# Altium PCB 1_ir-tara-f.PcbDoc (part 4 of 8)
Units mm, origin at the board's own origin, x right, y up, seen from the top; angles counter-clockwise.
Board outline 151 x 86.38 mm, 2 copper layers (Top Layer, Bottom Layer); 728 components, 20 nets, 2100 pads, 0 vias.
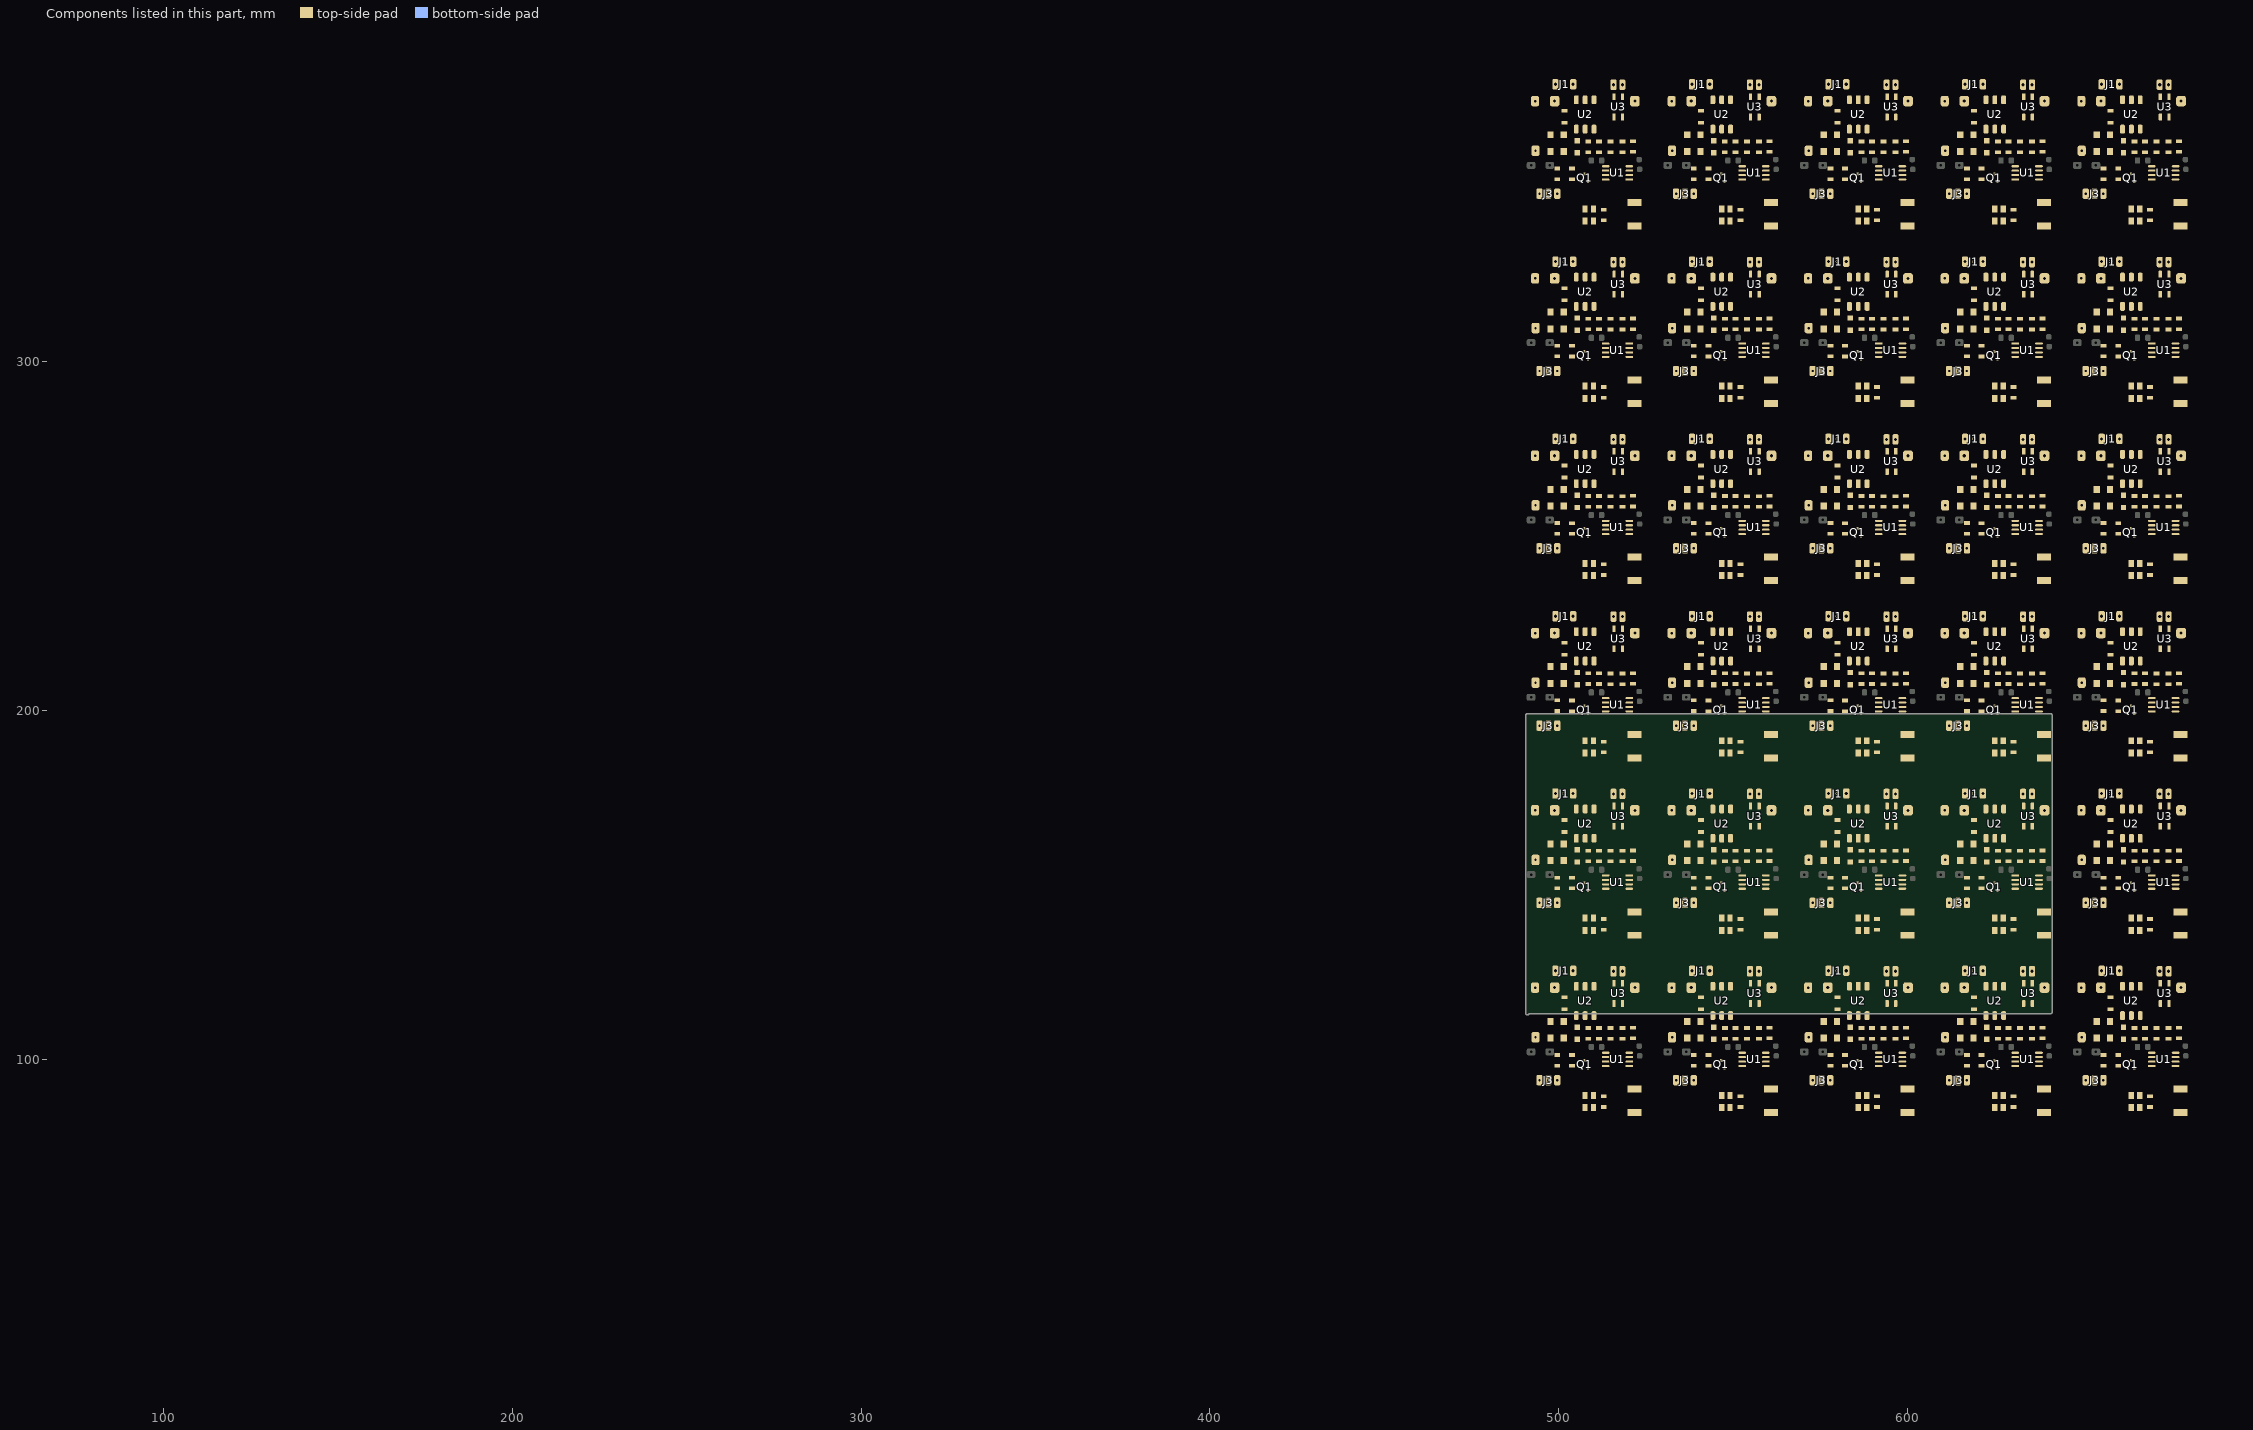
[diagram p4: the components of this part, seen from the top]

## Nets (pads, with @x,y where several pads share a name; then routed paths per layer and width w, separated by ;. In a path a pad name is that pad's centre, name@x,y a point inside that pad or via, vN(x,y) a via of type N, cw(c..) or ccw(c..) an arc to the next point about the centre after c; other vN are vias at no path point) (continued)
copper on no net: | length 14133.1
  Top Layer w0.254: 524.606,109.92 526.638,109.92 526.638,111.952 524.606,111.952 524.606,109.92 ; 524.606,160.758 524.606,162.79 526.638,162.79 526.638,160.758 524.606,160.758 ; 524.606,211.597 526.638,211.597 526.638,213.629 524.606,213.629 524.606,211.597 ; 524.606,262.436 526.638,262.436 526.638,264.468 524.606,264.468 524.606,262.436 ; 524.606,313.274 526.638,313.274 526.638,315.306 524.606,315.306 524.606,313.274 ; 524.606,364.113 526.638,364.113 526.638,366.145 524.606,366.145 524.606,364.113 ; 526.13,110.936 ccw(c525.622,110.936) 526.13,110.936 ; 526.13,161.774 ccw(c525.622,161.774) 526.13,161.774 ; 526.13,212.613 ccw(c525.622,212.613) 526.13,212.613 ; 526.13,263.452 ccw(c525.622,263.452) 526.13,263.452 ; 526.13,314.29 ccw(c525.622,314.29) 526.13,314.29 ; 526.13,365.129 ccw(c525.622,365.129) 526.13,365.129 ; 563.76,109.92 565.792,109.92 565.792,111.952 563.76,111.952 563.76,109.92 ; 563.76,160.758 563.76,162.79 565.792,162.79 565.792,160.758 563.76,160.758 ; 563.76,211.597 565.792,211.597 565.792,213.629 563.76,213.629 563.76,211.597 ; 563.76,262.436 565.792,262.436 565.792,264.468 563.76,264.468 563.76,262.436 ; 563.76,313.274 565.792,313.274 565.792,315.306 563.76,315.306 563.76,313.274 ; 563.76,364.113 565.792,364.113 565.792,366.145 563.76,366.145 563.76,364.113 ; 565.284,110.936 ccw(c564.776,110.936) 565.284,110.936 ; 565.284,161.774 ccw(c564.776,161.774) 565.284,161.774 ; 565.284,212.613 ccw(c564.776,212.613) 565.284,212.613 ; 565.284,263.452 ccw(c564.776,263.452) 565.284,263.452 ; 565.284,314.29 ccw(c564.776,314.29) 565.284,314.29 ; 565.284,365.129 ccw(c564.776,365.129) 565.284,365.129 ; 602.915,109.92 602.915,111.952 604.947,111.952 604.947,109.92 602.915,109.92 ; 602.915,160.758 604.947,160.758 604.947,162.79 602.915,162.79 602.915,160.758 ; 602.915,211.597 602.915,213.629 604.947,213.629 604.947,211.597 602.915,211.597 ; 602.915,262.436 602.915,264.468 604.947,264.468 604.947,262.436 602.915,262.436 ; 602.915,313.274 602.915,315.306 604.947,315.306 604.947,313.274 602.915,313.274 ; 602.915,364.113 602.915,366.145 604.947,366.145 604.947,364.113 602.915,364.113 ; 604.439,110.936 ccw(c603.931,110.936) 604.439,110.936 ; 604.439,161.774 ccw(c603.931,161.774) 604.439,161.774 ; 604.439,212.613 ccw(c603.931,212.613) 604.439,212.613 ; 604.439,263.452 ccw(c603.931,263.452) 604.439,263.452 ; 604.439,314.29 ccw(c603.931,314.29) 604.439,314.29 ; 604.439,365.129 ccw(c603.931,365.129) 604.439,365.129 ; 642.07,109.92 644.102,109.92 644.102,111.952 642.07,111.952 642.07,109.92 ; 642.07,160.758 642.07,162.79 644.102,162.79 644.102,160.758 642.07,160.758 ; 642.07,211.597 644.102,211.597 644.102,213.629 642.07,213.629 642.07,211.597 ; 642.07,262.436 644.102,262.436 644.102,264.468 642.07,264.468 642.07,262.436 ; 642.07,313.274 644.102,313.274 644.102,315.306 642.07,315.306 642.07,313.274 ; 642.07,364.113 644.102,364.113 644.102,366.145 642.07,366.145 642.07,364.113 ; 643.594,110.936 ccw(c643.086,110.936) 643.594,110.936 ; 643.594,161.774 ccw(c643.086,161.774) 643.594,161.774 ; 643.594,212.613 ccw(c643.086,212.613) 643.594,212.613 ; 643.594,263.452 ccw(c643.086,263.452) 643.594,263.452 ; 643.594,314.29 ccw(c643.086,314.29) 643.594,314.29 ; 643.594,365.129 ccw(c643.086,365.129) 643.594,365.129 ; 681.224,109.92 683.256,109.92 683.256,111.952 681.224,111.952 681.224,109.92 ; 681.224,160.758 681.224,162.79 683.256,162.79 683.256,160.758 681.224,160.758 ; 681.224,211.597 683.256,211.597 683.256,213.629 681.224,213.629 681.224,211.597 ; 681.224,262.436 683.256,262.436 683.256,264.468 681.224,264.468 681.224,262.436 ; 681.224,313.274 683.256,313.274 683.256,315.306 681.224,315.306 681.224,313.274 ; 681.224,364.113 683.256,364.113 683.256,366.145 681.224,366.145 681.224,364.113 ; 682.748,110.936 ccw(c682.24,110.936) 682.748,110.936 ; 682.748,161.774 ccw(c682.24,161.774) 682.748,161.774 ; 682.748,212.613 ccw(c682.24,212.613) 682.748,212.613 ; 682.748,263.452 ccw(c682.24,263.452) 682.748,263.452 ; 682.748,314.29 ccw(c682.24,314.29) 682.748,314.29 ; 682.748,365.129 ccw(c682.24,365.129) 682.748,365.129
  Top Layer w0.5: 507.461,86.199 507.588,86.199 510.001,86.199 ; 507.461,137.037 507.588,137.037 510.001,137.037 ; 507.461,187.876 507.588,187.876 510.001,187.876 ; 507.461,238.715 507.588,238.715 510.001,238.715 ; 507.461,289.553 507.588,289.553 510.001,289.553 ; 507.461,340.392 507.588,340.392 510.001,340.392 ; 511.525,109.024 511.85,109.024 512.125,108.749 512.125,108.685 ; 511.525,159.862 511.85,159.862 512.125,159.587 512.125,159.523 ; 511.525,210.701 511.85,210.701 512.125,210.426 512.125,210.362 ; 511.525,261.54 511.85,261.54 512.125,261.265 512.125,261.201 ; 511.525,312.378 511.85,312.378 512.125,312.103 512.125,312.039 ; 511.525,363.217 511.85,363.217 512.125,362.942 512.125,362.878 ; 520.259,100.649 523.075,100.649 ; 520.259,151.487 523.075,151.487 ; 520.259,202.326 523.075,202.326 ; 520.259,253.165 523.075,253.165 ; 520.259,304.003 523.075,304.003 ; 520.259,354.842 523.075,354.842 ; 520.743,101.919 520.789,101.965 ; 520.743,152.757 520.789,152.804 ; 520.743,203.596 520.789,203.642 ; 520.743,254.435 520.789,254.481 ; 520.743,305.273 520.789,305.319 ; 520.743,356.112 520.789,356.158 ; 546.615,86.199 546.742,86.199 549.155,86.199 ; 546.615,137.037 546.742,137.037 549.155,137.037 ; 546.615,187.876 546.742,187.876 549.155,187.876 ; 546.615,238.715 546.742,238.715 549.155,238.715 ; 546.615,289.553 546.742,289.553 549.155,289.553 ; 546.615,340.392 546.742,340.392 549.155,340.392 ; 550.679,109.024 551.004,109.024 551.279,108.749 551.279,108.685 ; 550.679,159.862 551.004,159.862 551.279,159.587 551.279,159.523 ; 550.679,210.701 551.004,210.701 551.279,210.426 551.279,210.362 ; 550.679,261.54 551.004,261.54 551.279,261.265 551.279,261.201 ; 550.679,312.378 551.004,312.378 551.279,312.103 551.279,312.039 ; 550.679,363.217 551.004,363.217 551.279,362.942 551.279,362.878 ; 559.413,100.649 562.23,100.649 ; 559.413,151.487 562.23,151.487 ; 559.413,202.326 562.23,202.326 ; 559.413,253.165 562.23,253.165 ; 559.413,304.003 562.23,304.003 ; 559.413,354.842 562.23,354.842 ; 559.897,101.919 559.943,101.965 ; 559.897,152.757 559.943,152.804 ; 559.897,203.596 559.943,203.642 ; 559.897,254.435 559.943,254.481 ; 559.897,305.273 559.943,305.319 ; 559.897,356.112 559.943,356.158 ; 585.77,86.199 585.897,86.199 588.31,86.199 ; 585.77,187.876 585.897,187.876 588.31,187.876 ; 585.77,238.715 585.897,238.715 588.31,238.715 ; 585.77,289.553 585.897,289.553 588.31,289.553 ; 585.77,340.392 585.897,340.392 588.31,340.392 ; 589.834,109.024 590.159,109.024 590.434,108.749 590.434,108.685 ; 589.834,210.701 590.159,210.701 590.434,210.426 590.434,210.362 ; 589.834,261.54 590.159,261.54 590.434,261.265 590.434,261.201 ; 589.834,312.378 590.159,312.378 590.434,312.103 590.434,312.039 ; 589.834,363.217 590.159,363.217 590.434,362.942 590.434,362.878 ; 598.568,100.649 601.384,100.649 ; 598.568,202.326 601.384,202.326 ; 598.568,253.165 601.384,253.165 ; 598.568,304.003 601.384,304.003 ; 598.568,354.842 601.384,354.842 ; 599.052,101.919 599.098,101.965 ; 599.052,203.596 599.098,203.642 ; 599.052,254.435 599.098,254.481 ; 599.052,305.273 599.098,305.319 ; 599.052,356.112 599.098,356.158 ; 624.925,86.199 625.052,86.199 627.465,86.199 ; 624.925,137.037 625.052,137.037 627.465,137.037 ; 624.925,187.876 625.052,187.876 627.465,187.876 ; 624.925,238.715 625.052,238.715 627.465,238.715 ; 624.925,289.553 625.052,289.553 627.465,289.553 ; 624.925,340.392 625.052,340.392 627.465,340.392 ; 628.989,109.024 629.314,109.024 629.589,108.749 629.589,108.685 ; 628.989,159.862 629.314,159.862 629.589,159.587 629.589,159.523 ; 628.989,210.701 629.314,210.701 629.589,210.426 629.589,210.362 ; 628.989,261.54 629.314,261.54 629.589,261.265 629.589,261.201 ; 628.989,312.378 629.314,312.378 629.589,312.103 629.589,312.039 ; 628.989,363.217 629.314,363.217 629.589,362.942 629.589,362.878 ; 637.723,100.649 640.539,100.649 ; 637.723,151.487 640.539,151.487 ; 637.723,202.326 640.539,202.326 ; 637.723,253.165 640.539,253.165 ; 637.723,304.003 640.539,304.003 ; 637.723,354.842 640.539,354.842 ; 638.206,101.919 638.253,101.965 ; 638.206,152.757 638.253,152.804 ; 638.206,203.596 638.253,203.642 ; 638.206,254.435 638.253,254.481 ; 638.206,305.273 638.253,305.319 ; 638.206,356.112 638.253,356.158 ; 664.079,86.199 664.206,86.199 666.619,86.199 ; 664.079,137.037 664.206,137.037 666.619,137.037 ; 664.079,187.876 664.206,187.876 666.619,187.876 ; 664.079,238.715 664.206,238.715 666.619,238.715 ; 664.079,289.553 664.206,289.553 666.619,289.553 ; 664.079,340.392 664.206,340.392 666.619,340.392 ; 668.143,109.024 668.468,109.024 668.743,108.749 668.743,108.685 ; 668.143,159.862 668.468,159.862 668.743,159.587 668.743,159.523 ; 668.143,210.701 668.468,210.701 668.743,210.426 668.743,210.362 ; 668.143,261.54 668.468,261.54 668.743,261.265 668.743,261.201 ; 668.143,312.378 668.468,312.378 668.743,312.103 668.743,312.039 ; 668.143,363.217 668.468,363.217 668.743,362.942 668.743,362.878 ; 676.877,100.649 679.694,100.649 ; 676.877,151.487 679.694,151.487 ; 676.877,202.326 679.694,202.326 ; 676.877,253.165 679.694,253.165 ; 676.877,304.003 679.694,304.003 ; 676.877,354.842 679.694,354.842 ; 677.361,101.919 677.407,101.965 ; 677.361,152.757 677.407,152.804 ; 677.361,203.596 677.407,203.642 ; 677.361,254.435 677.407,254.481 ; 677.361,305.273 677.407,305.319 ; 677.361,356.112 677.407,356.158
  Top Layer w0.6: 499.333,104.205 503.75,104.205 505.111,105.566 505.302,105.757 ; 499.333,155.043 503.75,155.043 505.111,156.405 505.302,156.595 ; 499.333,205.882 503.75,205.882 505.111,207.244 505.302,207.434 ; 499.333,256.721 503.75,256.721 505.111,258.082 505.302,258.273 ; 499.333,307.559 503.75,307.559 505.111,308.921 505.302,309.111 ; 499.333,358.398 503.75,358.398 505.111,359.759 505.302,359.95 ; 499.587,94.299 499.523,94.362 499.523,96.36 499.172,96.712 498.063,96.712 497.174,97.601 497.174,98.871 498.063,99.76 500.718,99.76 501.619,100.661 501.619,102.435 501.97,102.786 504.028,102.786 504.05,102.808 509.366,102.808 ; 499.587,98.227 499.728,98.367 501.229,98.367 502.558,99.696 507.461,99.696 ; 499.587,145.137 499.523,145.201 499.523,147.199 499.172,147.55 498.063,147.55 497.174,148.439 497.174,149.709 498.063,150.598 500.718,150.598 501.619,151.5 501.619,153.273 501.97,153.625 504.028,153.625 504.05,153.646 509.366,153.646 ; 499.587,149.065 499.728,149.206 501.229,149.206 502.558,150.535 507.461,150.535 ; 499.587,195.976 499.523,196.04 499.523,198.038 499.172,198.389 498.063,198.389 497.174,199.278 497.174,200.548 498.063,201.437 500.718,201.437 501.619,202.338 501.619,204.112 501.97,204.463 504.028,204.463 504.05,204.485 509.366,204.485 ; 499.587,199.904 499.728,200.045 501.229,200.045 502.558,201.374 507.461,201.374 ; 499.587,246.815 499.523,246.878 499.523,248.876 499.172,249.228 498.063,249.228 497.174,250.117 497.174,251.387 498.063,252.276 500.718,252.276 501.619,253.177 501.619,254.95 501.97,255.302 504.028,255.302 504.05,255.324 509.366,255.324 ; 499.587,250.743 499.728,250.883 501.229,250.883 502.558,252.212 507.461,252.212 ; 499.587,297.653 499.523,297.717 499.523,299.715 499.172,300.066 498.063,300.066 497.174,300.955 497.174,302.225 498.063,303.114 500.718,303.114 501.619,304.015 501.619,305.789 501.97,306.14 504.028,306.14 504.05,306.162 509.366,306.162 ; 499.587,301.581 499.728,301.722 501.229,301.722 502.558,303.051 507.461,303.051 ; 499.587,348.492 499.523,348.555 499.523,350.553 499.172,350.905 498.063,350.905 497.174,351.794 497.174,353.064 498.063,353.953 500.718,353.953 501.619,354.854 501.619,356.628 501.97,356.979 504.028,356.979 504.05,357.001 509.366,357.001 ; 499.587,352.42 499.728,352.561 501.229,352.561 502.558,353.89 507.461,353.89 ; 503.778,101.42 508.468,101.42 509.874,100.014 509.874,97.474 510.763,96.585 519.145,96.585 519.82,97.26 519.82,98.109 520.259,98.109 ; 503.778,152.258 508.468,152.258 509.874,150.852 509.874,148.312 510.763,147.423 519.145,147.423 519.82,148.099 519.82,148.947 520.259,148.947 ; 503.778,203.097 508.468,203.097 509.874,201.691 509.874,199.151 510.763,198.262 519.145,198.262 519.82,198.937 519.82,199.786 520.259,199.786 ; 503.778,253.936 508.468,253.936 509.874,252.53 509.874,249.99 510.763,249.101 519.145,249.101 519.82,249.776 519.82,250.625 520.259,250.625 ; 503.778,304.774 508.468,304.774 509.874,303.368 509.874,300.828 510.763,299.939 519.145,299.939 519.82,300.615 519.82,301.463 520.259,301.463 ; 503.778,355.613 508.468,355.613 509.874,354.207 509.874,351.667 510.763,350.778 519.145,350.778 519.82,351.453 519.82,352.302 520.259,352.302 ; 507.461,89.699 507.461,92.902 509.747,95.188 521.304,95.188 522.402,96.286 522.402,99.086 522.109,99.379 520.461,99.379 ; 507.461,140.537 507.461,143.74 509.747,146.026 521.304,146.026 522.402,147.124 522.402,149.924 522.109,150.217 520.461,150.217 ; 507.461,191.376 507.461,194.579 509.747,196.865 521.304,196.865 522.402,197.963 522.402,200.763 522.109,201.056 520.461,201.056 ; 507.461,242.215 507.461,245.418 509.747,247.704 521.304,247.704 522.402,248.802 522.402,251.602 522.109,251.895 520.461,251.895 ; 507.461,293.053 507.461,296.256 509.747,298.542 521.304,298.542 522.402,299.64 522.402,302.44 522.109,302.733 520.461,302.733 ; 507.461,343.892 507.461,347.095 509.747,349.381 521.304,349.381 522.402,350.479 522.402,353.279 522.109,353.572 520.461,353.572 ; 509.366,103.57 509.366,102.935 511.144,101.157 511.144,98.402 511.437,98.109 513.459,98.109 ; 509.366,154.408 509.366,153.773 511.144,151.995 511.144,149.24 511.437,148.947 513.459,148.947 ; 509.366,205.247 509.366,204.612 511.144,202.834 511.144,200.079 511.437,199.786 513.459,199.786 ; 509.366,256.086 509.366,255.451 511.144,253.673 511.144,250.918 511.437,250.625 513.459,250.625 ; 509.366,306.924 509.366,306.289 511.144,304.511 511.144,301.756 511.437,301.463 513.459,301.463 ; 509.366,357.763 509.366,357.128 511.144,355.35 511.144,352.595 511.437,352.302 513.459,352.302 ; 509.908,86.292 510.001,86.199 510.094,86.292 ; 509.908,137.131 510.001,137.037 510.094,137.131 ; 509.908,187.969 510.001,187.876 510.094,187.969 ; 509.908,238.808 510.001,238.715 510.094,238.808 ; 509.908,289.646 510.001,289.553 510.094,289.646 ; 509.908,340.485 510.001,340.392 510.094,340.485 ; 510.001,89.699 510.037,89.735 510.037,93.192 510.636,93.791 522.32,93.791 523.844,95.315 523.844,100.607 523.238,101.213 523.209,101.03 ; 510.001,140.537 510.037,140.573 510.037,144.03 510.636,144.629 522.32,144.629 523.844,146.153 523.844,151.445 523.238,152.051 523.209,151.868 ; 510.001,191.376 510.037,191.412 510.037,194.869 510.636,195.468 522.32,195.468 523.844,196.992 523.844,202.284 523.238,202.89 523.209,202.707 ; 510.001,242.215 510.037,242.251 510.037,245.708 510.636,246.307 522.32,246.307 523.844,247.831 523.844,253.123 523.238,253.729 523.209,253.546 ; 510.001,293.053 510.037,293.089 510.037,296.546 510.636,297.145 522.32,297.145 523.844,298.669 523.844,303.961 523.238,304.567 523.209,304.384 ; 510.001,343.892 510.037,343.928 510.037,347.385 510.636,347.984 522.32,347.984 523.844,349.508 523.844,354.8 523.238,355.406 523.209,355.223 ; 511.525,105.974 511.808,105.974 512.033,105.749 ; 511.525,156.812 511.808,156.812 512.033,156.587 ; 511.525,207.651 511.808,207.651 512.033,207.426 ; 511.525,258.49 511.808,258.49 512.033,258.265 ; 511.525,309.328 511.808,309.328 512.033,309.103 ; 511.525,360.167 511.808,360.167 512.033,359.942 ; 512.033,104.136 512.316,103.853 ; 512.033,154.975 512.316,154.692 ; 512.033,205.814 512.316,205.531 ; 512.033,256.652 512.316,256.369 ; 512.033,307.491 512.316,307.208 ; 512.033,358.329 512.316,358.046 ; 512.316,103.57 512.728,103.158 512.728,101.919 513.459,101.919 ; 512.316,154.408 512.728,153.996 512.728,152.757 513.459,152.757 ; 512.316,205.247 512.728,204.835 512.728,203.596 513.459,203.596 ; 512.316,256.086 512.728,255.674 512.728,254.435 513.459,254.435 ; 512.316,306.924 512.728,306.512 512.728,305.273 513.459,305.273 ; 512.316,357.763 512.728,357.351 512.728,356.112 513.459,356.112 ; 512.829,86.292 512.922,86.385 ; 512.829,137.131 512.922,137.224 ; 512.829,187.969 512.922,188.062 ; 512.829,238.808 512.922,238.901 ; 512.829,289.646 512.922,289.74 ; 512.829,340.485 512.922,340.578 ; 538.487,104.205 542.904,104.205 544.266,105.566 544.456,105.757 ; 538.487,155.043 542.904,155.043 544.266,156.405 544.456,156.595 ; 538.487,205.882 542.904,205.882 544.266,207.244 544.456,207.434 ; 538.487,256.721 542.904,256.721 544.266,258.082 544.456,258.273 ; 538.487,307.559 542.904,307.559 544.266,308.921 544.456,309.111 ; 538.487,358.398 542.904,358.398 544.266,359.759 544.456,359.95 ; 538.741,94.299 538.678,94.362 538.678,96.36 538.326,96.712 537.217,96.712 536.328,97.601 536.328,98.871 537.217,99.76 539.872,99.76 540.773,100.661 540.773,102.435 541.125,102.786 543.183,102.786 543.205,102.808 548.52,102.808 ; 538.741,98.227 538.882,98.367 540.383,98.367 541.712,99.696 546.615,99.696 ; 538.741,145.137 538.678,145.201 538.678,147.199 538.326,147.55 537.217,147.55 536.328,148.439 536.328,149.709 537.217,150.598 539.872,150.598 540.773,151.5 540.773,153.273 541.125,153.625 543.183,153.625 543.205,153.646 548.52,153.646 ; 538.741,149.065 538.882,149.206 540.383,149.206 541.712,150.535 546.615,150.535 ; 538.741,195.976 538.678,196.04 538.678,198.038 538.326,198.389 537.217,198.389 536.328,199.278 536.328,200.548 537.217,201.437 539.872,201.437 540.773,202.338 540.773,204.112 541.125,204.463 543.183,204.463 543.204,204.485 548.52,204.485 ; 538.741,199.904 538.882,200.045 540.383,200.045 541.712,201.374 546.615,201.374 ; 538.741,246.815 538.678,246.878 538.678,248.876 538.326,249.228 537.217,249.228 536.328,250.117 536.328,251.387 537.217,252.276 539.872,252.276 540.773,253.177 540.773,254.95 541.125,255.302 543.183,255.302 543.204,255.324 548.52,255.324 ; 538.741,250.743 538.882,250.883 540.383,250.883 541.712,252.212 546.615,252.212 ; 538.741,297.653 538.678,297.717 538.678,299.715 538.326,300.066 537.217,300.066 536.328,300.955 536.328,302.225 537.217,303.114 539.872,303.114 540.773,304.015 540.773,305.789 541.125,306.14 543.183,306.14 543.204,306.162 548.52,306.162 ; 538.741,301.581 538.882,301.722 540.383,301.722 541.712,303.051 546.615,303.051 ; 538.741,348.492 538.678,348.555 538.678,350.553 538.326,350.905 537.217,350.905 536.328,351.794 536.328,353.064 537.217,353.953 539.872,353.953 540.773,354.854 540.773,356.628 541.125,356.979 543.183,356.979 543.204,357.001 548.52,357.001 ; 538.741,352.42 538.882,352.561 540.383,352.561 541.712,353.89 546.615,353.89 ; 542.932,101.42 547.622,101.42 549.028,100.014 549.028,97.474 549.917,96.585 558.299,96.585 558.975,97.26 558.975,98.109 559.413,98.109 ; 542.932,152.258 547.622,152.258 549.028,150.852 549.028,148.312 549.917,147.423 558.299,147.423 558.975,148.099 558.975,148.947 559.413,148.947 ; 542.932,203.097 547.622,203.097 549.028,201.691 549.028,199.151 549.917,198.262 558.299,198.262 558.975,198.937 558.975,199.786 559.413,199.786 ; 542.932,253.936 547.622,253.936 549.028,252.53 549.028,249.99 549.917,249.101 558.299,249.101 558.975,249.776 558.975,250.625 559.413,250.625 ; 542.932,304.774 547.622,304.774 549.028,303.368 549.028,300.828 549.917,299.939 558.299,299.939 558.975,300.615 558.975,301.463 559.413,301.463 ; 542.932,355.613 547.622,355.613 549.028,354.207 549.028,351.667 549.917,350.778 558.299,350.778 558.975,351.453 558.975,352.302 559.413,352.302 ; 546.615,89.699 546.615,92.902 548.901,95.188 560.458,95.188 561.556,96.286 561.556,99.086 561.263,99.379 559.616,99.379 ; 546.615,140.537 546.615,143.74 548.901,146.026 560.458,146.026 561.556,147.124 561.556,149.924 561.263,150.217 559.616,150.217 ; 546.615,191.376 546.615,194.579 548.901,196.865 560.458,196.865 561.556,197.963 561.556,200.763 561.263,201.056 559.616,201.056 ; 546.615,242.215 546.615,245.418 548.901,247.704 560.458,247.704 561.556,248.802 561.556,251.602 561.263,251.895 559.616,251.895 ; 546.615,293.053 546.615,296.256 548.901,298.542 560.458,298.542 561.556,299.64 561.556,302.44 561.263,302.733 559.616,302.733 ; 546.615,343.892 546.615,347.095 548.901,349.381 560.458,349.381 561.556,350.479 561.556,353.279 561.263,353.572 559.616,353.572 ; 548.52,103.57 548.52,102.935 550.298,101.157 550.298,98.402 550.591,98.109 552.613,98.109 ; 548.52,154.408 548.52,153.773 550.298,151.995 550.298,149.24 550.591,148.947 552.613,148.947 ; 548.52,205.247 548.52,204.612 550.298,202.834 550.298,200.079 550.591,199.786 552.613,199.786 ; 548.52,256.086 548.52,255.451 550.298,253.673 550.298,250.918 550.591,250.625 552.613,250.625 ; 548.52,306.924 548.52,306.289 550.298,304.511 550.298,301.756 550.591,301.463 552.613,301.463 ; 548.52,357.763 548.52,357.128 550.298,355.35 550.298,352.595 550.591,352.302 552.613,352.302 ; 549.062,289.646 549.155,289.553 549.249,289.646 ; 549.062,340.485 549.155,340.392 549.249,340.485 ; 549.062,86.292 549.155,86.199 549.249,86.292 ; 549.062,137.131 549.155,137.037 549.249,137.131 ; 549.062,187.969 549.155,187.876 549.249,187.969 ; 549.062,238.808 549.155,238.715 549.249,238.808 ; 549.155,89.699 549.192,89.735 549.192,93.192 549.79,93.791 561.474,93.791 562.998,95.315 562.998,100.607 562.392,101.213 562.363,101.03 ; 549.155,140.537 549.192,140.573 549.192,144.03 549.79,144.629 561.474,144.629 562.998,146.153 562.998,151.445 562.392,152.051 562.363,151.868 ; 549.155,191.376 549.192,191.412 549.192,194.869 549.79,195.468 561.474,195.468 562.998,196.992 562.998,202.284 562.392,202.89 562.363,202.707 ; 549.155,242.215 549.192,242.251 549.192,245.708 549.79,246.307 561.474,246.307 562.998,247.831 562.998,253.123 562.392,253.729 562.363,253.546 ; 549.155,293.053 549.192,293.089 549.192,296.546 549.79,297.145 561.474,297.145 562.998,298.669 562.998,303.961 562.392,304.567 562.363,304.384 ; 549.155,343.892 549.192,343.928 549.192,347.385 549.79,347.984 561.474,347.984 562.998,349.508 562.998,354.8 562.392,355.406 562.363,355.223 ; 550.679,105.974 550.962,105.974 551.187,105.749 ; 550.679,156.812 550.962,156.812 551.187,156.587 ; 550.679,207.651 550.962,207.651 551.187,207.426 ; 550.679,258.49 550.962,258.49 551.187,258.265 ; 550.679,309.328 550.962,309.328 551.187,309.103 ; 550.679,360.167 550.962,360.167 551.187,359.942 ; 551.187,104.136 551.47,103.853 ; 551.187,154.975 551.47,154.692 ; 551.187,205.814 551.47,205.531 ; 551.187,256.652 551.47,256.369 ; 551.187,307.491 551.47,307.208 ; 551.187,358.329 551.47,358.046 ; 551.47,103.57 551.882,103.158 551.882,101.919 552.613,101.919 ; 551.47,154.408 551.882,153.996 551.882,152.757 552.613,152.757 ; 551.47,205.247 551.882,204.835 551.882,203.596 552.613,203.596 ; 551.47,256.086 551.882,255.674 551.882,254.435 552.613,254.435 ; 551.47,306.924 551.882,306.512 551.882,305.273 552.613,305.273 ; 551.47,357.763 551.882,357.351 551.882,356.112 552.613,356.112 ; 551.983,289.646 552.076,289.74 ; 551.983,340.485 552.076,340.578 ; 551.983,86.292 552.076,86.385 ; 551.983,137.131 552.076,137.224 ; 551.983,187.969 552.076,188.062 ; 551.983,238.808 552.076,238.901 ; 577.642,104.205 582.059,104.205 583.421,105.566 583.611,105.757 ; 577.642,205.882 582.059,205.882 583.421,207.244 583.611,207.434 ; 577.642,256.721 582.059,256.721 583.421,258.082 583.611,258.273 ; 577.642,307.559 582.059,307.559 583.421,308.921 583.611,309.111 ; 577.642,358.398 582.059,358.398 583.421,359.759 583.611,359.95 ; 577.896,94.299 577.833,94.362 577.833,96.36 577.481,96.712 576.372,96.712 575.483,97.601 575.483,98.871 576.372,99.76 579.027,99.76 579.928,100.661 579.928,102.435 580.28,102.786 582.337,102.786 582.359,102.808 587.675,102.808 ; 577.896,98.227 578.037,98.367 579.538,98.367 580.867,99.696 585.77,99.696 ; 577.896,195.976 577.833,196.04 577.833,198.038 577.481,198.389 576.372,198.389 575.483,199.278 575.483,200.548 576.372,201.437 579.027,201.437 579.928,202.338 579.928,204.112 580.28,204.463 582.337,204.463 582.359,204.485 587.675,204.485 ; 577.896,199.904 578.037,200.045 579.538,200.045 580.867,201.374 585.77,201.374 ; 577.896,246.815 577.833,246.878 577.833,248.876 577.481,249.228 576.372,249.228 575.483,250.117 575.483,251.387 576.372,252.276 579.027,252.276 579.928,253.177 579.928,254.95 580.28,255.302 582.337,255.302 582.359,255.324 587.675,255.324 ; 577.896,250.743 578.037,250.883 579.538,250.883 580.867,252.212 585.77,252.212 ; 577.896,297.653 577.833,297.717 577.833,299.715 577.481,300.066 576.372,300.066 575.483,300.955 575.483,302.225 576.372,303.114 579.027,303.114 579.928,304.015 579.928,305.789 580.28,306.14 582.337,306.14 582.359,306.162 587.675,306.162 ; 577.896,301.581 578.037,301.722 579.538,301.722 580.867,303.051 585.77,303.051 ; 577.896,348.492 577.833,348.555 577.833,350.553 577.481,350.905 576.372,350.905 575.483,351.794 575.483,353.064 576.372,353.953 579.027,353.953 579.928,354.854 579.928,356.628 580.28,356.979 582.337,356.979 582.359,357.001 587.675,357.001 ; 577.896,352.42 578.037,352.561 579.538,352.561 580.867,353.89 585.77,353.89 ; 582.087,101.42 586.777,101.42 588.183,100.014 588.183,97.474 589.072,96.585 597.454,96.585 598.13,97.26 598.13,98.109 598.568,98.109 ; 582.087,203.097 586.777,203.097 588.183,201.691 588.183,199.151 589.072,198.262 597.454,198.262 598.13,198.937 598.13,199.786 598.568,199.786 ; 582.087,253.936 586.777,253.936 588.183,252.53 588.183,249.99 589.072,249.101 597.454,249.101 598.13,249.776 598.13,250.625 598.568,250.625 ; 582.087,304.774 586.777,304.774 588.183,303.368 588.183,300.828 589.072,299.939 597.454,299.939 598.13,300.615 598.13,301.463 598.568,301.463 ; 582.087,355.613 586.777,355.613 588.183,354.207 588.183,351.667 589.072,350.778 597.454,350.778 598.13,351.453 598.13,352.302 598.568,352.302 ; 585.77,89.699 585.77,92.902 588.056,95.188 599.613,95.188 600.711,96.286 600.711,99.086 600.418,99.379 598.77,99.379 ; 585.77,191.376 585.77,194.579 588.056,196.865 599.613,196.865 600.711,197.963 600.711,200.763 600.418,201.056 598.77,201.056 ; 585.77,242.215 585.77,245.418 588.056,247.704 599.613,247.704 600.711,248.802 600.711,251.602 600.418,251.895 598.77,251.895 ; 585.77,293.053 585.77,296.256 588.056,298.542 599.613,298.542 600.711,299.64 600.711,302.44 600.418,302.733 598.77,302.733 ; 585.77,343.892 585.77,347.095 588.056,349.381 599.613,349.381 600.711,350.479 600.711,353.279 600.418,353.572 598.77,353.572 ; 587.675,103.57 587.675,102.935 589.453,101.157 589.453,98.402 589.746,98.109 591.768,98.109 ; 587.675,205.247 587.675,204.612 589.453,202.834 589.453,200.079 589.746,199.786 591.768,199.786 ; 587.675,256.086 587.675,255.451 589.453,253.673 589.453,250.918 589.746,250.625 591.768,250.625 ; 587.675,306.924 587.675,306.289 589.453,304.511 589.453,301.756 589.746,301.463 591.768,301.463 ; 587.675,357.763 587.675,357.128 589.453,355.35 589.453,352.595 589.746,352.302 591.768,352.302 ; 588.217,86.292 588.31,86.199 588.403,86.292 ; 588.217,187.969 588.31,187.876 588.403,187.969 ; 588.217,238.808 588.31,238.715 588.403,238.808 ; 588.217,289.646 588.31,289.553 588.403,289.646 ; 588.217,340.485 588.31,340.392 588.403,340.485 ; 588.31,89.699 588.346,89.735 588.346,93.192 588.945,93.791 600.629,93.791 602.153,95.315 602.153,100.607 601.547,101.213 601.518,101.03 ; 588.31,191.376 588.346,191.412 588.346,194.869 588.945,195.468 600.629,195.468 602.153,196.992 602.153,202.284 601.547,202.89 601.518,202.707 ; 588.31,242.215 588.346,242.251 588.346,245.708 588.945,246.307 600.629,246.307 602.153,247.831 602.153,253.123 601.547,253.729 601.518,253.546 ; 588.31,293.053 588.346,293.089 588.346,296.546 588.945,297.145 600.629,297.145 602.153,298.669 602.153,303.961 601.547,304.567 601.518,304.384 ; 588.31,343.892 588.346,343.928 588.346,347.385 588.945,347.984 600.629,347.984 602.153,349.508 602.153,354.8 601.547,355.406 601.518,355.223 ; 589.834,105.974 590.117,105.974 590.342,105.749 ; 589.834,207.651 590.117,207.651 590.342,207.426 ; 589.834,258.49 590.117,258.49 590.342,258.265 ; 589.834,309.328 590.117,309.328 590.342,309.103 ; 589.834,360.167 590.117,360.167 590.342,359.942 ; 590.342,104.136 590.625,103.853 ; 590.342,205.814 590.625,205.531 ; 590.342,256.652 590.625,256.369 ; 590.342,307.491 590.625,307.208 ; 590.342,358.329 590.625,358.046 ; 590.625,103.57 591.037,103.158 591.037,101.919 591.768,101.919 ; 590.625,205.247 591.037,204.835 591.037,203.596 591.768,203.596 ; 590.625,256.086 591.037,255.674 591.037,254.435 591.768,254.435 ; 590.625,306.924 591.037,306.512 591.037,305.273 591.768,305.273 ; 590.625,357.763 591.037,357.351 591.037,356.112 591.768,356.112 ; 591.138,86.292 591.231,86.385 ; 591.138,187.969 591.231,188.062 ; 591.138,238.808 591.231,238.901 ; 591.138,289.646 591.231,289.74 ; 591.138,340.485 591.231,340.578 ; 616.797,104.205 621.214,104.205 622.575,105.566 622.766,105.757 ; 616.797,155.043 621.214,155.043 622.575,156.405 622.766,156.595 ; 616.797,205.882 621.214,205.882 622.575,207.244 622.766,207.434 ; 616.797,256.721 621.214,256.721 622.575,258.082 622.766,258.273 ; 616.797,307.559 621.214,307.559 622.575,308.921 622.766,309.111 ; 616.797,358.398 621.214,358.398 622.575,359.759 622.766,359.95 ; 617.051,94.299 616.987,94.362 616.987,96.36 616.636,96.712 615.527,96.712 614.638,97.601 614.638,98.871 615.527,99.76 618.182,99.76 619.083,100.661 619.083,102.435 619.434,102.786 621.492,102.786 621.514,102.808 626.83,102.808 ; 617.051,98.227 617.191,98.367 618.693,98.367 620.022,99.696 624.925,99.696 ; 617.051,145.137 616.987,145.201 616.987,147.199 616.636,147.55 615.527,147.55 614.638,148.439 614.638,149.709 615.527,150.598 618.181,150.598 619.083,151.5 619.083,153.273 619.434,153.625 621.492,153.625 621.514,153.646 626.83,153.646 ; 617.051,149.065 617.191,149.206 618.693,149.206 620.022,150.535 624.925,150.535 ; 617.051,195.976 616.987,196.04 616.987,198.038 616.636,198.389 615.527,198.389 614.638,199.278 614.638,200.548 615.527,201.437 618.181,201.437 619.083,202.338 619.083,204.112 619.434,204.463 621.492,204.463 621.514,204.485 626.83,204.485 ; 617.051,199.904 617.191,200.045 618.693,200.045 620.022,201.374 624.925,201.374 ; 617.051,246.815 616.987,246.878 616.987,248.876 616.636,249.228 615.527,249.228 614.638,250.117 614.638,251.387 615.527,252.276 618.181,252.276 619.083,253.177 619.083,254.95 619.434,255.302 621.492,255.302 621.514,255.324 626.83,255.324 ; 617.051,250.743 617.191,250.883 618.693,250.883 620.022,252.212 624.925,252.212 ; 617.051,297.653 616.987,297.717 616.987,299.715 616.636,300.066 615.527,300.066 614.638,300.955 614.638,302.225 615.527,303.114 618.181,303.114 619.083,304.015 619.083,305.789 619.434,306.14 621.492,306.14 621.514,306.162 626.83,306.162 ; 617.051,301.581 617.191,301.722 618.693,301.722 620.022,303.051 624.925,303.051 ; 617.051,348.492 616.987,348.555 616.987,350.553 616.636,350.905 615.527,350.905 614.638,351.794 614.638,353.064 615.527,353.953 618.181,353.953 619.083,354.854 619.083,356.628 619.434,356.979 621.492,356.979 621.514,357.001 626.83,357.001 ; 617.051,352.42 617.191,352.561 618.693,352.561 620.022,353.89 624.925,353.89 ; 621.242,101.42 625.932,101.42 627.338,100.014 627.338,97.474 628.227,96.585 636.609,96.585 637.284,97.26 637.284,98.109 637.723,98.109 ; 621.242,152.258 625.932,152.258 627.338,150.852 627.338,148.312 628.227,147.423 636.609,147.423 637.284,148.099 637.284,148.947 637.723,148.947 ; 621.242,203.097 625.932,203.097 627.338,201.691 627.338,199.151 628.227,198.262 636.609,198.262 637.284,198.937 637.284,199.786 637.723,199.786 ; 621.242,253.936 625.932,253.936 627.338,252.53 627.338,249.99 628.227,249.101 636.609,249.101 637.284,249.776 637.284,250.625 637.723,250.625 ; 621.242,304.774 625.932,304.774 627.338,303.368 627.338,300.828 628.227,299.939 636.609,299.939 637.284,300.615 637.284,301.463 637.723,301.463 ; 621.242,355.613 625.932,355.613 627.338,354.207 627.338,351.667 628.227,350.778 636.609,350.778 637.284,351.453 637.284,352.302 637.723,352.302 ; 624.925,89.699 624.925,92.902 627.211,95.188 638.768,95.188 639.866,96.286 639.866,99.086 639.573,99.379 637.925,99.379 ; 624.925,140.537 624.925,143.74 627.211,146.026 638.768,146.026 639.866,147.124 639.866,149.924 639.573,150.217 637.925,150.217 ; 624.925,191.376 624.925,194.579 627.211,196.865 638.768,196.865 639.866,197.963 639.866,200.763 639.573,201.056 637.925,201.056 ; 624.925,242.215 624.925,245.418 627.211,247.704 638.768,247.704 639.866,248.802 639.866,251.602 639.573,251.895 637.925,251.895 ; 624.925,293.053 624.925,296.256 627.211,298.542 638.768,298.542 639.866,299.64 639.866,302.44 639.573,302.733 637.925,302.733 ; 624.925,343.892 624.925,347.095 627.211,349.381 638.768,349.381 639.866,350.479 639.866,353.279 639.573,353.572 637.925,353.572 ; 626.83,103.57 626.83,102.935 628.608,101.157 628.608,98.402 628.901,98.109 630.923,98.109 ; 626.83,154.408 626.83,153.773 628.608,151.995 628.608,149.24 628.901,148.947 630.923,148.947 ; 626.83,205.247 626.83,204.612 628.608,202.834 628.608,200.079 628.901,199.786 630.923,199.786 ; 626.83,256.086 626.83,255.451 628.608,253.673 628.608,250.918 628.901,250.625 630.923,250.625 ; 626.83,306.924 626.83,306.289 628.608,304.511 628.608,301.756 628.901,301.463 630.923,301.463 ; 626.83,357.763 626.83,357.128 628.608,355.35 628.608,352.595 628.901,352.302 630.923,352.302 ; 627.372,86.292 627.465,86.199 627.558,86.292 ; 627.372,137.131 627.465,137.037 627.558,137.131 ; 627.372,187.969 627.465,187.876 627.558,187.969 ; 627.372,238.808 627.465,238.715 627.558,238.808 ; 627.372,289.646 627.465,289.553 627.558,289.646 ; 627.372,340.485 627.465,340.392 627.558,340.485 ; 627.465,89.699 627.501,89.735 627.501,93.192 628.1,93.791 639.784,93.791 641.308,95.315 641.308,100.607 640.702,101.213 640.673,101.03 ; 627.465,140.537 627.501,140.573 627.501,144.03 628.1,144.629 639.784,144.629 641.308,146.153 641.308,151.445 640.702,152.051 640.673,151.868 ; 627.465,191.376 627.501,191.412 627.501,194.869 628.1,195.468 639.784,195.468 641.308,196.992 641.308,202.284 640.702,202.89 640.673,202.707 ; 627.465,242.215 627.501,242.251 627.501,245.708 628.1,246.307 639.784,246.307 641.308,247.831 641.308,253.123 640.702,253.729 640.673,253.546 ; 627.465,293.053 627.501,293.089 627.501,296.546 628.1,297.145 639.784,297.145 641.308,298.669 641.308,303.961 640.702,304.567 640.673,304.384 ; 627.465,343.892 627.501,343.928 627.501,347.385 628.1,347.984 639.784,347.984 641.308,349.508 641.308,354.8 640.702,355.406 640.673,355.223 ; 628.989,105.974 629.272,105.974 629.497,105.749 ; 628.989,156.812 629.272,156.812 629.497,156.587 ; 628.989,207.651 629.272,207.651 629.497,207.426 ; 628.989,258.49 629.272,258.49 629.497,258.265 ; 628.989,309.328 629.272,309.328 629.497,309.103 ; 628.989,360.167 629.272,360.167 629.497,359.942 ; 629.497,104.136 629.78,103.853 ; 629.497,154.975 629.78,154.692 ; 629.497,205.814 629.78,205.531 ; 629.497,256.652 629.78,256.369 ; 629.497,307.491 629.78,307.208 ; 629.497,358.329 629.78,358.046 ; 629.78,103.57 630.192,103.158 630.192,101.919 630.923,101.919 ; 629.78,154.408 630.192,153.996 630.192,152.757 630.923,152.757 ; 629.78,205.247 630.192,204.835 630.192,203.596 630.923,203.596 ; 629.78,256.086 630.192,255.674 630.192,254.435 630.923,254.435 ; 629.78,306.924 630.192,306.512 630.192,305.273 630.923,305.273 ; 629.78,357.763 630.192,357.351 630.192,356.112 630.923,356.112 ; 630.293,86.292 630.386,86.385 ; 630.293,137.131 630.386,137.224 ; 630.293,187.969 630.386,188.062 ; 630.293,238.808 630.386,238.901 ; 630.293,289.646 630.386,289.74 ; 630.293,340.485 630.386,340.578 ; 655.951,104.205 660.368,104.205 661.73,105.566 661.92,105.757 ; 655.951,155.043 660.368,155.043 661.73,156.405 661.92,156.595 ; 655.951,205.882 660.368,205.882 661.73,207.244 661.92,207.434 ; 655.951,256.721 660.368,256.721 661.73,258.082 661.92,258.273 ; 655.951,307.559 660.368,307.559 661.73,308.921 661.92,309.111 ; 655.951,358.398 660.368,358.398 661.73,359.759 661.92,359.95 ; 656.205,94.299 656.142,94.362 656.142,96.36 655.79,96.712 654.681,96.712 653.792,97.601 653.792,98.871 654.681,99.76 657.336,99.76 658.237,100.661 658.237,102.435 658.589,102.786 660.647,102.786 660.668,102.808 665.984,102.808 ; 656.205,98.227 656.346,98.367 657.847,98.367 659.176,99.696 664.079,99.696 ; 656.205,145.137 656.142,145.201 656.142,147.199 655.79,147.55 654.681,147.55 653.792,148.439 653.792,149.709 654.681,150.598 657.336,150.598 658.237,151.5 658.237,153.273 658.589,153.625 660.647,153.625 660.668,153.646 665.984,153.646 ; 656.205,149.065 656.346,149.206 657.847,149.206 659.176,150.535 664.079,150.535 ; 656.205,195.976 656.142,196.04 656.142,198.038 655.79,198.389 654.681,198.389 653.792,199.278 653.792,200.548 654.681,201.437 657.336,201.437 658.237,202.338 658.237,204.112 658.589,204.463 660.647,204.463 660.668,204.485 665.984,204.485 ; 656.205,199.904 656.346,200.045 657.847,200.045 659.176,201.374 664.079,201.374 ; 656.205,246.815 656.142,246.878 656.142,248.876 655.79,249.228 654.681,249.228 653.792,250.117 653.792,251.387 654.681,252.276 657.336,252.276 658.237,253.177 658.237,254.95 658.589,255.302 660.647,255.302 660.668,255.324 665.984,255.324 ; 656.205,250.743 656.346,250.883 657.847,250.883 659.176,252.212 664.079,252.212 ; 656.205,297.653 656.142,297.717 656.142,299.715 655.79,300.066 654.681,300.066 653.792,300.955 653.792,302.225 654.681,303.114 657.336,303.114 658.237,304.015 658.237,305.789 658.589,306.14 660.647,306.14 660.668,306.162 665.984,306.162 ; 656.205,301.581 656.346,301.722 657.847,301.722 659.176,303.051 664.079,303.051 ; 656.205,348.492 656.142,348.555 656.142,350.553 655.79,350.905 654.681,350.905 653.792,351.794 653.792,353.064 654.681,353.953 657.336,353.953 658.237,354.854 658.237,356.628 658.589,356.979 660.647,356.979 660.668,357.001 665.984,357.001 ; 656.205,352.42 656.346,352.561 657.847,352.561 659.176,353.89 664.079,353.89 ; 660.396,101.42 665.086,101.42 666.492,100.014 666.492,97.474 667.381,96.585 675.763,96.585 676.439,97.26 676.439,98.109 676.877,98.109 ; 660.396,152.258 665.086,152.258 666.492,150.852 666.492,148.312 667.381,147.423 675.763,147.423 676.439,148.099 676.439,148.947 676.877,148.947 ; 660.396,203.097 665.086,203.097 666.492,201.691 666.492,199.151 667.381,198.262 675.763,198.262 676.439,198.937 676.439,199.786 676.877,199.786 ; 660.396,253.936 665.086,253.936 666.492,252.53 666.492,249.99 667.381,249.101 675.763,249.101 676.439,249.776 676.439,250.625 676.877,250.625 ; 660.396,304.774 665.086,304.774 666.492,303.368 666.492,300.828 667.381,299.939 675.763,299.939 676.439,300.615 676.439,301.463 676.877,301.463 ; 660.396,355.613 665.086,355.613 666.492,354.207 666.492,351.667 667.381,350.778 675.763,350.778 676.439,351.453 676.439,352.302 676.877,352.302 ; 664.079,89.699 664.079,92.902 666.365,95.188 677.922,95.188 679.02,96.286 679.02,99.086 678.727,99.379 677.079,99.379 ; 664.079,140.537 664.079,143.74 666.365,146.026 677.922,146.026 679.02,147.124 679.02,149.924 678.727,150.217 677.079,150.217 ; 664.079,191.376 664.079,194.579 666.365,196.865 677.922,196.865 679.02,197.963 679.02,200.763 678.727,201.056 677.079,201.056 ; 664.079,242.215 664.079,245.418 666.365,247.704 677.922,247.704 679.02,248.802 679.02,251.602 678.727,251.895 677.079,251.895 ; 664.079,293.053 664.079,296.256 666.365,298.542 677.922,298.542 679.02,299.64 679.02,302.44 678.727,302.733 677.079,302.733 ; 664.079,343.892 664.079,347.095 666.365,349.381 677.922,349.381 679.02,350.479 679.02,353.279 678.727,353.572 677.079,353.572 ; 665.984,103.57 665.984,102.935 667.762,101.157 667.762,98.402 668.055,98.109 670.077,98.109 ; 665.984,154.408 665.984,153.773 667.762,151.995 667.762,149.24 668.055,148.947 670.077,148.947 ; 665.984,205.247 665.984,204.612 667.762,202.834 667.762,200.079 668.055,199.786 670.077,199.786 ; 665.984,256.086 665.984,255.451 667.762,253.673 667.762,250.918 668.055,250.625 670.077,250.625 ; 665.984,306.924 665.984,306.289 667.762,304.511 667.762,301.756 668.055,301.463 670.077,301.463 ; 665.984,357.763 665.984,357.128 667.762,355.35 667.762,352.595 668.055,352.302 670.077,352.302 ; 666.526,86.292 666.619,86.199 666.712,86.292 ; 666.526,137.131 666.619,137.037 666.712,137.131 ; 666.526,187.969 666.619,187.876 666.712,187.969 ; 666.526,238.808 666.619,238.715 666.712,238.808 ; 666.526,289.646 666.619,289.553 666.712,289.646 ; 666.526,340.485 666.619,340.392 666.712,340.485 ; 666.619,89.699 666.655,89.735 666.655,93.192 667.254,93.791 678.938,93.791 680.462,95.315 680.462,100.607 679.856,101.213 679.827,101.03 ; 666.619,140.537 666.655,140.573 666.655,144.03 667.254,144.629 678.938,144.629 680.462,146.153 680.462,151.445 679.856,152.051 679.827,151.868 ; 666.619,191.376 666.655,191.412 666.655,194.869 667.254,195.468 678.938,195.468 680.462,196.992 680.462,202.284 679.856,202.89 679.827,202.707 ; 666.619,242.215 666.655,242.251 666.655,245.708 667.254,246.307 678.938,246.307 680.462,247.831 680.462,253.123 679.856,253.729 679.827,253.546 ; 666.619,293.053 666.655,293.089 666.655,296.546 667.254,297.145 678.938,297.145 680.462,298.669 680.462,303.961 679.856,304.567 679.827,304.384 ; 666.619,343.892 666.655,343.928 666.655,347.385 667.254,347.984 678.938,347.984 680.462,349.508 680.462,354.8 679.856,355.406 679.827,355.223 ; 668.143,105.974 668.426,105.974 668.651,105.749 ; 668.143,156.812 668.426,156.812 668.651,156.587 ; 668.143,207.651 668.426,207.651 668.651,207.426 ; 668.143,258.49 668.426,258.49 668.651,258.265 ; 668.143,309.328 668.426,309.328 668.651,309.103 ; 668.143,360.167 668.426,360.167 668.651,359.942 ; 668.651,104.136 668.934,103.853 ; 668.651,154.975 668.934,154.692 ; 668.651,205.814 668.934,205.531 ; 668.651,256.652 668.934,256.369 ; 668.651,307.491 668.934,307.208 ; 668.651,358.329 668.934,358.046 ; 668.934,103.57 669.346,103.158 669.346,101.919 670.077,101.919 ; 668.934,154.408 669.346,153.996 669.346,152.757 670.077,152.757 ; 668.934,205.247 669.346,204.835 669.346,203.596 670.077,203.596 ; 668.934,256.086 669.346,255.674 669.346,254.435 670.077,254.435 ; 668.934,306.924 669.346,306.512 669.346,305.273 670.077,305.273 ; 668.934,357.763 669.346,357.351 669.346,356.112 670.077,356.112 ; 669.447,86.292 669.54,86.385 ; 669.447,137.131 669.54,137.224 ; 669.447,187.969 669.54,188.062 ; 669.447,238.808 669.54,238.901 ; 669.447,289.646 669.54,289.74 ; 669.447,340.485 669.54,340.578
  Top Layer w0.65: 513.459,99.379 513.464,99.374 516.981,99.374 517.756,100.149 ; 513.459,150.217 513.464,150.212 516.981,150.212 517.756,150.987 ; 513.459,201.056 513.464,201.051 516.981,201.051 517.756,201.826 ; 513.459,251.895 513.464,251.89 516.981,251.89 517.756,252.665 ; 513.459,302.733 513.464,302.728 516.981,302.728 517.756,303.503 ; 513.459,353.572 513.464,353.567 516.981,353.567 517.756,354.342 ; 514.234,304.003 515.716,304.003 ; 514.234,354.842 515.716,354.842 ; 514.234,100.649 515.716,100.649 ; 514.234,151.487 515.716,151.487 ; 514.234,202.326 515.716,202.326 ; 514.234,253.165 515.716,253.165 ; 552.613,99.379 552.618,99.374 556.135,99.374 556.91,100.149 ; 552.613,150.217 552.618,150.212 556.135,150.212 556.91,150.987 ; 552.613,201.056 552.618,201.051 556.135,201.051 556.91,201.826 ; 552.613,251.895 552.618,251.89 556.135,251.89 556.91,252.665 ; 552.613,302.733 552.618,302.728 556.135,302.728 556.91,303.503 ; 552.613,353.572 552.618,353.567 556.135,353.567 556.91,354.342 ; 553.388,100.649 554.87,100.649 ; 553.388,151.487 554.87,151.487 ; 553.388,202.326 554.87,202.326 ; 553.388,253.165 554.87,253.165 ; 553.388,304.003 554.87,304.003 ; 553.388,354.842 554.87,354.842 ; 591.768,99.379 591.773,99.374 595.29,99.374 596.065,100.149 ; 591.768,201.056 591.773,201.051 595.29,201.051 596.065,201.826 ; 591.768,251.895 591.773,251.89 595.29,251.89 596.065,252.665 ; 591.768,302.733 591.773,302.728 595.29,302.728 596.065,303.503 ; 591.768,353.572 591.773,353.567 595.29,353.567 596.065,354.342 ; 592.543,100.649 594.025,100.649 ; 592.543,202.326 594.025,202.326 ; 592.543,253.165 594.025,253.165 ; 592.543,304.003 594.025,304.003 ; 592.543,354.842 594.025,354.842 ; 630.923,99.379 630.928,99.374 634.445,99.374 635.22,100.149 ; 630.923,150.217 630.928,150.212 634.445,150.212 635.22,150.987 ; 630.923,201.056 630.928,201.051 634.445,201.051 635.22,201.826 ; 630.923,251.895 630.928,251.89 634.445,251.89 635.22,252.665 ; 630.923,302.733 630.928,302.728 634.445,302.728 635.22,303.503 ; 630.923,353.572 630.928,353.567 634.445,353.567 635.22,354.342 ; 631.698,100.649 633.18,100.649 ; 631.698,151.487 633.18,151.487 ; 631.698,202.326 633.18,202.326 ; 631.698,253.165 633.18,253.165 ; 631.698,304.003 633.18,304.003 ; 631.698,354.842 633.18,354.842 ; 670.077,99.379 670.082,99.374 673.599,99.374 674.374,100.149 ; 670.077,150.217 670.082,150.212 673.599,150.212 674.374,150.987 ; 670.077,201.056 670.082,201.051 673.599,201.051 674.374,201.826 ; 670.077,251.895 670.082,251.89 673.599,251.89 674.374,252.665 ; 670.077,302.733 670.082,302.728 673.599,302.728 674.374,303.503 ; 670.077,353.572 670.082,353.567 673.599,353.567 674.374,354.342 ; 670.852,100.649 672.334,100.649 ; 670.852,151.487 672.334,151.487 ; 670.852,202.326 672.334,202.326 ; 670.852,253.165 672.334,253.165 ; 670.852,304.003 672.334,304.003 ; 670.852,354.842 672.334,354.842